# Allegro board 600-90681-01_CYW920721M2EPA2_Rev3.0.brd
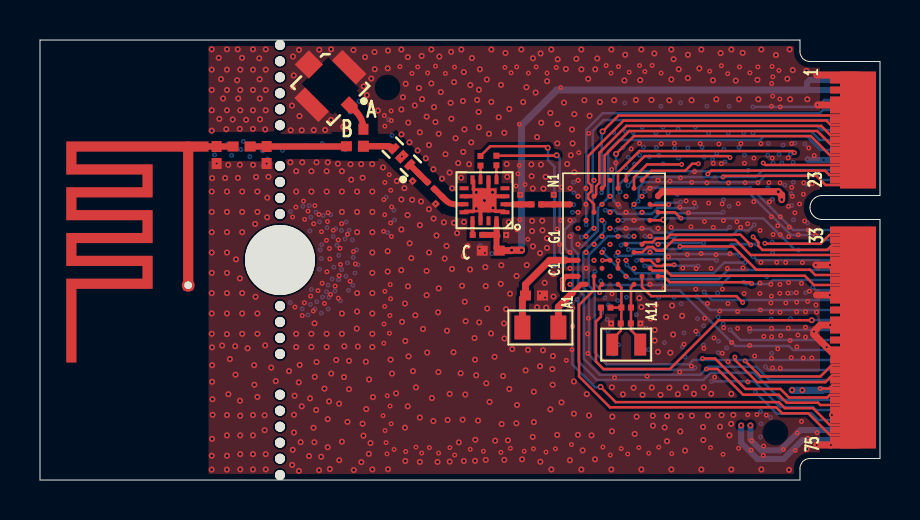
[diagram p0: board, top side]
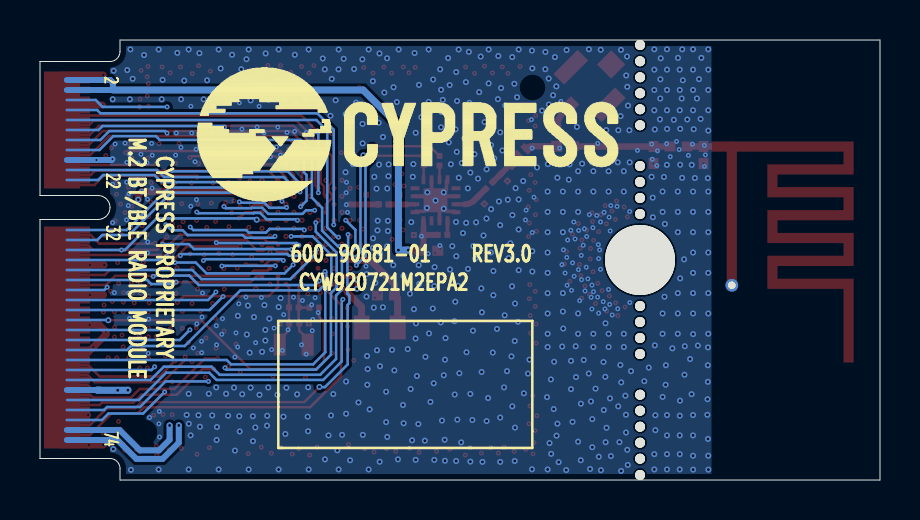
[diagram p1: board, bottom side, seen from below]

Outline 42 x 22 mm; copper layers: TOP, L02_GND, L03_PWR-GND, BOTTOM. Coordinates in mm from the lower left corner of the outline.
Outline path: 0,22 38,22 38,21.43 arc(38.15,21.07) 38.5,20.93 42,20.93 42,14.22 39.1,14.22 arc(38.68,14.05) 38.5,13.62 arc(38.68,13.2) 39.1,13.03 42,13.03 42,1.07 38.5,1.07 arc(38.15,0.93) 38,0.57 38,0 0,0 0,22

## Design rules (mm)
net group PWR: nets VBAT VDDIO VPA_BT

## Placement (name value [footprint] x y rotation side)
ANT1  MIFA PCB Antenna  [ANT_ETCH_MIFA-0000_01]  6.39 12.92 90 top
C1  4.7uF  [CAPC1005_IS0402Q]  24.7 9.23 0 top
C2  6pF  [CAPC0603_IS0201Q]  28.8 7.83 180 top
C3  6pF  [CAPC0603_IS0201Q]  29.78 7.83 0 top
C17  8.2pF  [CAPC1005_IS0402Q_OPT_AB_RA_M]  16.17 16.69 180 top
C18  100pF  [CAPC0603_IS0201Q]  23.07 12.25 180 top
C19  1uF  [CAPC1005_IS0402Q]  22.54 11.47 180 top
C20  9pF  [CAPC0603_IS0201Q]  21.87 12.26 180 top
FL1  LFB182G45CL3D178  [FILS3_MUR_LFB182G45Q]  18.09 16.17 135 top
J1  A-1JB  [AMPHL_A-1JB_ALT1]  14.52 19.7 45 top
J2  For MILI-67  [M_2_CARD_2230-XX-E_ANT]  40.9 20.25 90 top
L1  2.2uH  [BKPX_201210]  25.02 7.62 0 top
LC1  5.6pF  [CAPC1005_IS0402Q]  10.08 16.67 0 top
LC2  1pF  [CAPC1005_IS0402Q]  8.83 16.25 270 top
LC3  1pF  [CAPC1005_IS0402Q]  11.33 16.25 270 top
LC4  0 OHM  [RESC0603_IS0201Q]  19.54 14.72 315 top
LC5  100pF  [CAPC0603_IS0201Q]  19.95 13.97 45 top
LC6  100pF  [CAPC0603_IS0201Q]  18.8 15.12 45 top
LC7  0 OHM  [RESC0603_IS0201Q]  24.82 13.78 180 top
LC8  100pF  [CAPC0603_IS0201Q]  25.69 14.02 270 top
LC9  100pF  [CAPC0603_IS0201Q]  24.02 14.02 270 top
NOREF  -  []  -4.09 86.38 0 top
NOREF#2  -  []  363.24 -144.64 0 top
NOREF#3  -  []  38.3 20.97 0 top
NOREF#4  -  []  38.65 13.22 0 top
NOREF#5  -  []  0 0 90 top
NOREF#6  -  []  42 1.07 90 top
NOREF#7  -  []  83.84 43.32 0 top
NOREF#8  -  []  0 0 0 top
NOREF#9  -  []  0 22 0 top
NOREF#10  -  []  42 14.22 90 top
NOREF#11  -  []  129.37 -8.65 90 top
NOREF#12  -  []  -335.26 -223.38 0 top
NOREF#13  -  []  72.55 172.43 0 top
NOREF#14  -  []  -33 -33.2 0 top
NOREF#15  -  []  -60.47 -17.5 0 top
NOREF#16  -  []  363.24 -144.64 180 bottom
R1  0 OHM  [RESC0603_IS0201Q]  28.28 8.62 180 top
R6  10M OHM  [RESC0603_IS0201Q]  29.31 8.63 0 top
R7  0 OHM  [RESC0603_IS0201Q]  22.02 15.96 90 top
R8  0 OHM  [RESC0603_IS0201Q]  22.82 15.98 90 top
U1  LBCA1KU1WA-temp  [BGA42_590X510_LBCA1KU1PA-TEMP]  28.7 12.39 90 top
U3  8TR8211C  [QFN16_2X2_8TR8211]  22.22 13.99 180 top
Y1  32.768KHz  [9H03270044_2X1M2]  29.31 6.77 0 top

## Library data of the parts
ANT1 = ANT-FEED-GND: Tolerance: ?; User Part Number: *********
C1 = CAP: User Part Number: Part No; room: BASEBAND
C2 C3 LC5 LC6 LC8 LC9 = CAP: User Part Number: Part No
C17 = CAP-OPT-A-B_0: User Part Number: Part No; room: RF
C18-C20 LC1-LC3 = CAP: User Part Number: Part No; room: RF
FL1 = FILT-I1O3G2: User Part Number: Part No; room: RF
J1 = RF-3GND: User Part Number: Part No
J2 = M_2.2_Module_V1
L1 = IND: User Part Number: Part No; room: RF
LC4 LC7 R6-R8 = RES: User Part Number: Part No
R1 = RES: User Part Number: Part No; room: BASEBAND
U1 = TYPE-1PA: room: BASEBAND
U3 = 8TR8211C_QFN16
Y1 = XTAL: Tolerance: ?; User Part Number: *********

## Footprints (pads in the part's own frame, mm; a bottom-side part is the same pattern mirrored in y, then rotated)
9H03270044_2X1M2
  rect 0.6x1.1 smd: 1(-0.7,0) 2(0.7,0)
AMPHL_A-1JB_ALT1
  rect 0.75x1.7 smd: G1(-1.325,0) G3(1.325,0)
  rect 1x1 smd: G2(0,1.524)
  custom 0.6x0.75 smd: S(0,-1.399)
ANT_ETCH_MIFA-0000_01
  round 0.635 smd: FEED(3.683,-1.016)
  round 0.635 hole 0.381: GND(-3.188,-1.016)
BGA42_590X510_LBCA1KU1PA-TEMP
  round 0.25 smd: A1(-2.6,2.2) A3(-2.6,1.4) A5(-2.6,0.6) A7(-2.6,-0.2) A9(-2.6,-1) A11(-2.6,-1.8) B2(-2.2,1.8) B4(-2.2,1) B6(-2.2,0.2) B8(-2.2,-0.6) B10(-2.2,-1.4) B12(-2.2,-2.2) C1(-1.8,2.2) C3(-1.8,1.4) C5(-1.8,0.6) C7(-1.8,-0.2) C9(-1.8,-1) C11(-1.8,-1.8) D2(-1.4,1.8) D4(-1.4,1) D6(-1.4,0.2) D8(-1.4,-0.6) D10(-1.4,-1.4) D12(-1.4,-2.2) E1(-1,2.2) E3(-1,1.4) E5(-1,0.6) E7(-1,-0.2) E9(-1,-1) E11(-1,-1.8) F2(-0.6,1.8) F4(-0.6,1) F6(-0.6,0.2) F8(-0.6,-0.6) F10(-0.6,-1.4) F12(-0.6,-2.2) G1(-0.2,2.2) G3(-0.2,1.4) G5(-0.2,0.6) G7(-0.2,-0.2) G9(-0.2,-1) G11(-0.2,-1.8) H2(0.2,1.8) H4(0.2,1) H6(0.2,0.2) H8(0.2,-0.6) H10(0.2,-1.4) H12(0.2,-2.2) J1(0.6,2.2) J3(0.6,1.4) J5(0.6,0.6) J7(0.6,-0.2) J9(0.6,-1) J11(0.6,-1.8) K2(1,1.8) K4(1,1) K6(1,0.2) K8(1,-0.6) K10(1,-1.4) K12(1,-2.2) L1(1.4,2.2) L3(1.4,1.4) L5(1.4,0.6) L7(1.4,-0.2) L9(1.4,-1) L11(1.4,-1.8) M2(1.8,1.8) M4(1.8,1) M6(1.8,0.2) M8(1.8,-0.6) M10(1.8,-1.4) M12(1.8,-2.2) N1(2.2,2.2) N3(2.2,1.4) N5(2.2,0.6) N7(2.2,-0.2) N9(2.2,-1) N11(2.2,-1.8) P2(2.6,1.8) P4(2.6,1) P6(2.6,0.2) P8(2.6,-0.6) P10(2.6,-1.4) P12(2.6,-2.2)
BKPX_201210
  rect 0.8x1.2 smd: 1(-0.9,0) 2(0.9,0)
CAPC0603_IS0201Q
  rect 0.3x0.3 smd: 1(-0.24,0) 2(0.24,0)
CAPC1005_IS0402Q
  rect 0.55x0.5 smd: 1(-0.425,0) 2(0.425,0)
CAPC1005_IS0402Q_OPT_AB_RA_M
  rect 0.5x0.55 smd: A(0,-0.85)
  rect 0.55x0.5 smd: B(0.85,0)
  rect 0.55x0.55 smd: C(0,0)
FILS3_MUR_LFB182G45Q
  rect 0.3x0.55 smd: 1(-0.56,0) 3(0.56,0)
  rect 0.4x0.6 smd: 2(0,0)
M_2_CARD_2230-XX-E_ANT
  round 0.5 hole 0.5 unplated: (-20,28.902) (-19.186,28.902) (-18.386,28.902) (-17.586,28.902) (-16.786,28.902) (-15.986,28.902) (-13.95,28.9) (-13.15,28.9) (-12.35,28.9) (-11.55,28.9) (-6.95,28.9) (-6.15,28.9) (-5.35,28.9) (-4.55,28.9) (-2.514,28.902) (-1.714,28.902) (-0.914,28.902) (-0.114,28.902) (0.686,28.902) (1.5,28.902)
  round 3.5 hole 3.5 unplated: (-9.25,28.9)
  rect 0.35x1.8 smd: 1(0,0) 3(-0.5,0) 5(-1,0) 7(-1.5,0) 9(-2,0) 11(-2.5,0) 13(-3,0) 15(-3.5,0) 17(-4,0) 19(-4.5,0) 21(-5,0) 23(-5.5,0) 33(-8,0) 35(-8.5,0) 37(-9,0) 39(-9.5,0) 41(-10,0) 43(-10.5,0) 45(-11,0) 47(-11.5,0) 49(-12,0) 51(-12.5,0) 53(-13,0) 55(-13.5,0) 57(-14,0) 59(-14.5,0) 61(-15,0) 63(-15.5,0) 65(-16,0) 67(-16.5,0) 69(-17,0) 71(-17.5,0) 73(-18,0) 75(-18.5,0)
  rect 0.35x2.3 smd: 2(-0.25,0.25) 4(-0.75,0.25) 6(-1.25,0.25) 8(-1.75,0.25) 10(-2.25,0.25) 12(-2.75,0.25) 14(-3.25,0.25) 16(-3.75,0.25) 18(-4.25,0.25) 20(-4.75,0.25) 22(-5.25,0.25) 32(-7.75,0.25) 34(-8.25,0.25) 36(-8.75,0.25) 38(-9.25,0.25) 40(-9.75,0.25) 42(-10.25,0.25) 44(-10.75,0.25) 46(-11.25,0.25) 48(-11.75,0.25) 50(-12.25,0.25) 52(-12.75,0.25) 54(-13.25,0.25) 56(-13.75,0.25) 58(-14.25,0.25) 60(-14.75,0.25) 62(-15.25,0.25) 64(-15.75,0.25) 66(-16.25,0.25) 68(-16.75,0.25) 70(-17.25,0.25) 72(-17.75,0.25) 74(-18.25,0.25)
QFN16_2X2_8TR8211
  rect 0.45x0.2 smd: 1(-1.025,0.6) 2(-1.025,0.2) 3(-1.025,-0.2) 4(-1.025,-0.6) 9(1.025,-0.6) 10(1.025,-0.2) 11(1.025,0.2) 12(1.025,0.6)
  rect 0.2x0.45 smd: 5(-0.6,-1.025) 6(-0.2,-1.025) 7(0.2,-1.025) 8(0.6,-1.025) 13(0.6,1.025) 14(0.2,1.025) 15(-0.2,1.025) 16(-0.6,1.025)
  rect 1.2x1.2 smd: H(0,0)
RESC0603_IS0201Q
  rect 0.3x0.3 smd: 1(-0.24,0) 2(0.24,0)

## Nets
GND: ANT1.FEED ANT1.GND C1.2 C2.2 C3.2 C18.1 C19.2 FL1.2(GND) J1.G1(GND#G1) J1.G2(GND#G2) J1.G3(GND#G3) J2.1(GND_1) J2.7(GND_7) J2.18(GND_18) J2.39(GND_39) J2.45(GND_45) J2.51(GND_51) J2.57(GND_57) J2.69(GND_69) J2.75(GND_75) LC1.1 LC2.1 LC2.2 LC3.2 LC5.1 LC6.1 LC8.1 LC9.1 U1.A1(GND (A1)) U1.A11(GND (A11)) U1.C1(GND (C1)) U1.C3(GND (C3)) U1.E1(GND (E1)) U1.E11(GND (E11)) U1.F2(GND (F2)) U1.F12(GND (F12)) U1.G1(GND (G1)) U1.G11(GND (G11)) U1.H8(GND (H8)) U1.H10(GND (H10)) U1.H12(GND (H12)) U1.J1(GND (J1)) U1.J9(GND (J9)) U1.K2(GND (K2)) U1.K8(GND (K8)) U1.L3(GND (L3)) U1.L7(GND (L7)) U1.M2(GND (M2)) U1.N1(GND (N1)) U1.N3(GND (N3)) U1.N11(GND (N11)) U1.P2(GND (P2)) U1.P4(GND (P4)) U1.P12(GND (P12)) U3.1(GND1) U3.3(GND3) U3.6(GND6) U3.8(GND8) U3.10(GND10) U3.12(GND12) U3.14(GND14) U3.H(HS-GND)
VBAT: J2.72(VBAT_72) J2.74(VBAT_74) U1.B2(VDD3P3)
VDDIO: J2.64(VDDIO) U1.M12(VDDIO)
BT_GPIO_2: J2.48(COEX1) U1.L9(BT_GPIO_2)
BT_GPIO_3: J2.46(COEX2) U1.N9(BT_GPIO_3)
BT_GPIO_5: J2.44(COEX3) U1.N7(BT_GPIO_5)
BT_UART_CTS_N: J2.36(BT_UART_CTS) J2.63(RECOVERY) U1.J11(BT_UART_CTS_N)
BT_UART_RTS_N: J2.34(BT_UART_RTS) U1.L11(BT_UART_RTS_N)
BT_UART_RXD: J2.32(BT_UART_RXD) U1.M10(BT_UART_RXD)
BT_UART_TXD: J2.22(BT_UART_TXD) U1.K10(BT_UART_TXD)
CBUCK: C1.1 L1.1 U1.D2(BT_CBUCK_IN)
CRX: R7.2 U1.B8(P36)
CTX: R8.2 U1.D6(P35)
DEV_WAKE: J2.42(RSVD_11) U1.P8(BT_DEV_WAKE)
EXT_LPO: J2.50(EXT_LPO (32KHZ)) R1.2
HOST_WAKE: J2.20(RSVD_12) U1.M8(BT_HOST_WAKE)
P00: J2.14(IO7) U1.E5(P0)
P01: J2.23(IO2) U1.D8(P1)
P02: J2.38(IO3) U1.F10(P2)
P03: J2.37(IO5) U1.E9(P3)
P04: J2.13(IO12) U1.M4(P4)
P05: J2.35(IO4) U1.M6(P5)
P06: J2.15(IO11) U1.N5(P6)
P07: J2.9(IO13) U1.L5(P7)
P08: J2.17(A0) U1.J7(P8)
P09: J2.19(A1) U1.G9(P9)
P10: J2.21(IO10) U1.C9(P10)
P11: J2.58(SDA) U1.G7(P11)
P12: J2.60(SCL) U1.E7(P12)
P13: J2.40(IO9) U1.H4(P13)
P14: J2.43(RSVD_3) U1.C11(P14)
P15: J2.41(RSVD_4) U1.K12(P15)
P16: J2.67(A2) U1.H6(P16)
P17: J2.61(RSVD_1) U1.K6(P17)
P18: J2.59(RSVD_2) U1.G5(P18)
P21: J2.52(ARD_RST_N) U1.B10(P21)
P22: J2.70(RSVD_5) U1.B12(P22)
P23: J2.68(RSVD_6) U1.F6(P23)
P24: J2.66(RSVD_7) U1.B6(P24)
P25: J2.10(A5) U1.F4(P25)
P26: J2.6(LED1_N) U1.C7(P26)
P27: J2.16(LED2_N) U1.E3(P27)
P28: J2.65(A3) U1.D10(P28)
P29: J2.8(A4) U1.G3(P29)
P30: J2.56(RSVD_9) U1.D4(P30)
P31: J2.33(RSVD_10) U1.A5(P31)
P32: J2.73(IO0) U1.B4(P32)
P33: J2.71(IO1) U1.J3(P33)
P34: J2.12(IO6) U1.J5(P34)
P37: J2.62(RSVD_8) U1.H2(P37)
P38: J2.11(IO8) U1.K4(P38)
RF: LC7.1 LC8.2 U1.L1(BT_RF)
RST_N: J2.54(BT_RST_N) U1.P10(RST_N)
VPA_BT: C18.2 C19.1 C20.1 J2.2(VPA2 (1.8V/3.3V)) J2.4(VPA4 (1.8V/3.3V)) U3.16(VDD16)
N16860919: L1.2 U1.A3(BT_CBUCK_OUT)
N16861443: C3.1 R6.2 U1.A9(BT_XTAL_32K_O) Y1.2
N16861445: C2.1 R1.1 R6.1 U1.A7(BT_XTAL_32K_I) Y1.1
N18809916: LC7.2 LC9.2 U3.2(TXRX)
N18809920: FL1.1(IN) LC4.1 LC6.2
N18809926: LC4.2 LC5.2 U3.11(ANT)
N18809978: R7.1 U3.7(RXEN)
N18809980: R8.1 U3.5(TXEN)
N18810127: C20.2 U3.13(DNC13)
N18810374: C17.B LC1.2 LC3.1
N18810880: C17.C(COMMON) FL1.3(OUT)
N18837786: C17.A J1.S(IN)

Pads without a net: J2 3 5 47 49 53 55; U1 C5 D12 F8 P6; U3 4 9 15

## Via types
v1: diameter 0.25, hole 0.1, TOP to L02_GND, 412 vias
v2: diameter 0.3, hole 0.15, L02_GND to L03_PWR-GND, 364 vias
v3: diameter 0.25, hole 0.1, L03_PWR-GND to BOTTOM, 247 vias
v4: diameter 0.3, hole 0.15, TOP to BOTTOM, 580 vias

## Routing (per net, layer and track width the routed paths; a pad name or vN(x,y) marks a point on that pad's centre or on a via; arc(x,y) is an arc through that point)
GND: length 30.8
  TOP w0.18: U3.8 21.68,14.96 21.68,14.53 22.02,14.19 ; 22.37,13.84 U3.H 22.77,13.44 23.2,13.44 U3.1 ; 22.02,13.79 21.67,13.43 21.24,13.43 U3.12
  TOP w0.2: U3.H 22.02,14.19 U3.10
  TOP w0.203: U3.14 22.02,13.79 U3.H 22.42,14.19 ; 22.42,14.19 U3.6 ; 22.42,14.19 U3.3
  TOP w0.3: v1(39.6,3.25) J2.69
  TOP w0.318: LC1.1 LC2.1 7.48,16.67 ANT1.FEED
  TOP w0.35: J2.75 39.55,1.75 ; 39.55,1.75 v1(38.84,1.75) ; 39.55,1.75 v1(39.55,1.75) ; J2.1 v1(38.84,20.25) ; J2.39 v1(39.5,10.75) v1(38.79,10.75) ; J2.51 v1(39.51,7.75) 39.02,7.75 38.7,7.43 v1(38.7,7.42) 38.7,7.28 38.7,7.28 v1(39.33,6.64) 39.73,6.25 J2.57 ; J2.7 v1(38.88,18.75) ; J2.45 v1(39.49,9.25) 38.82,9.25
  L02_GND w0.125: v1(28.9,13.79) 28.89,13.79 28.53,13.79 28.24,13.51 27.76,13.51
  L02_GND w0.18: v1(29.3,13.39) 29.3,13.41 28.93,13.79 v1(28.9,13.79)
  BOTTOM w0.3: v3(38.38,16.04) 38.42,16 v3(39.18,16) J2.18
  vias: v1(8.83,15.82) v1(11.33,15.82) v1(12.63,13.15) v1(12.75,8.65) v1(12.79,13.65) v1(13.11,8.22) v1(13.18,13.95) v1(13.23,13.03) v1(13.22,8.86) v1(13.4,13.44) v1(13.54,9.2) v1(13.74,13.72) v1(13.68,12.81) v1(13.66,8.45) v1(13.95,13.28) v1(13.9,9.47) v1(14.07,12.41) v1(14.11,9.84) v1(14.22,8.83) v1(14.32,11.98) v1(14.35,10.41) v1(14.4,13.37) v1(14.37,12.92) v1(14.47,11.58) v1(14.49,11.05) v1(14.53,9.28) v1(14.66,12.49) v1(14.75,9.7) v1(14.91,12) v1(14.91,9.09) v1(15,11.59) v1(15.02,10.78) v1(14.96,10.22) v1(15.08,12.81) v1(15.38,12.28) v1(15.51,9.94) v1(15.68,11.42) v1(15.77,10.8) v1(17.21,18.23) v1(17.24,17.69) v1(17.24,14.88) v1(17.19,14.02) v1(17.23,13.26) v1(17.18,12.44) v1(17.24,9.44) v1(17.23,8.68) v1(17.2,7.79) v1(17.19,6.84) v1(17.16,3.22) v1(17.25,2.47) v1(17.3,1.87) v1(17.35,1.31) v1(17.36,4.21) v1(17.46,15.27) v1(17.54,14.48) v1(17.53,12.85) v1(17.51,9.77) v1(17.53,9.06) v1(17.5,8.22) v1(17.47,7.34) v1(17.5,3.7) v1(17.55,18.45) v1(17.56,17.97) v1(17.59,13.65) v1(17.57,12.18) v1(17.55,2.81) v1(17.7,1.53) v1(18,20.67) v1(18.09,16.18) v1(18.29,1.43) v1(18.6,20.33) v1(18.64,14.94) v1(18.8,1.65) v1(18.89,20.66) v1(19.09,1.35) v1(19.38,20.35) v1(19.47,1.62) v1(19.77,20.69) v1(19.78,13.81) v1(19.93,1.35) v1(20.27,20.33) v1(20.49,1.62) v1(20.73,20.65) v1(20.73,1.25) v1(21.51,1.54) v1(21.98,11.57) v1(22.24,11.35) v1(22.17,1.44) v1(23.05,1.38) v1(23.25,20.63) v1(23.31,12.25) v1(23.52,1.59) v1(23.55,20.36) v1(23.84,20.66) v1(23.8,14.7) v1(23.85,12.51) v1(23.9,15.31) v1(23.97,17.79) v1(23.96,15.73) v1(24.02,14.26) v1(23.99,13.02) v1(24.21,1.44) v1(24.25,14.78) v1(24.42,20.34) v1(24.39,12.04) v1(24.67,1.56) v1(24.8,20.66) v1(24.99,9.34) v1(25.26,9.11) v1(25.3,1.39) v1(25.35,20.34) v1(25.69,14.26) v1(25.81,20.62) v1(25.77,1.56) v1(25.86,12.54) v1(26.04,19.62) v1(26.03,12.99) v1(25.98,11.78) v1(26.07,14.64) v1(26.32,5.98) v1(26.5,14.59) v1(26.5,12.99) v1(26.5,12.19) v1(26.5,11.39) v1(26.5,10.59) v1(26.5,9.79) v1(26.63,8.6) v1(26.63,7.68) v1(26.6,6.51) v1(26.57,1.77) v1(26.94,16.37) v1(26.9,14.99) v1(26.9,14.19) v1(26.9,13.39) v1(26.9,11.79) v1(27.3,14.59) v1(27.3,13.79) v1(27.3,10.59) v1(27.43,17.33) v1(27.42,8.09) v1(27.38,7.3) v1(27.4,6.33) v1(27.7,14.99) v1(28.14,1.65) v1(28.3,20.72) v1(28.51,1.25) v1(28.55,20.34) v1(28.58,15.53) v1(28.6,9.31) v1(28.56,7.83) v1(28.73,5.12) v1(28.79,15.85) v1(28.93,20.67) v1(29.06,1.57) v1(29.3,12.59) v1(29.38,1.3) v1(29.46,20.39) v1(29.56,16.55) v1(29.7,12.99) v1(29.94,1.62) v1(29.98,20.72) v1(29.98,16.84) v1(30.02,7.83) v1(30.1,12.59) v1(30.24,20.43) v1(30.35,5.19) v1(30.44,1.34) v1(30.5,14.59) v1(30.5,12.19) v1(30.5,11.39) v1(30.5,9.79) v1(30.61,20.73) v1(30.9,14.99) v1(30.9,12.59) v1(30.9,11.79) v1(30.94,1.64) v1(31.06,20.34) v1(31.06,16.81) v1(31.2,9.58) v1(31.42,11.16) v1(31.5,14.95) v1(31.56,12.63) v1(31.59,1.31) v1(31.72,16.84) v1(32.02,15.11) v1(32,13.64) v1(31.98,5.4) v1(32.14,10.6) v1(32.2,6.79) v1(32.3,13.96) v1(32.42,13.36) v1(32.37,11.27) v1(32.55,12.66) v1(32.58,14.88) v1(32.57,5.7) v1(32.73,15.42) v1(32.72,13.86) v1(32.81,10.57) v1(32.79,9.54) v1(32.8,7.44) v1(33.01,16.82) v1(33.05,11.32) v1(33.22,12.93) v1(33.23,8.09) v1(33.2,6.58) v1(33.34,14.86) v1(33.44,13.85) v1(33.37,8.82) v1(33.48,20.44) v1(33.53,1.62) v1(33.55,10.58) v1(33.66,15.83) v1(33.66,12.63) v1(33.7,7.1) v1(33.73,5.14) v1(33.8,11.27) v1(33.95,16.8) v1(33.98,8.45) v1(34.07,20.71) v1(34.06,15.82) v1(34.11,13.8) v1(34.12,9.54) v1(34.11,6.34) v1(34.17,12.97) v1(34.19,7.61) v1(34.15,1.29) v1(34.39,20.31) v1(34.42,14.85) v1(34.37,10.57) v1(34.4,8.82) v1(34.4,5.92) v1(34.5,11.31) v1(34.58,6.88) v1(34.84,12.91) v1(34.91,13.81) v1(34.88,8.43) v1(34.88,7.58) v1(34.93,1.59) v1(34.98,20.66) v1(35.05,16.82) v1(35.03,12.63) v1(35.15,10.61) v1(35.22,15.84) v1(35.2,9.32) v1(35.26,14.87) v1(35.38,12.81) v1(35.39,4.91) v1(35.39,3.26) v1(35.49,20.36) v1(35.48,7.58) v1(35.49,6.73) v1(35.59,1.96) v1(35.55,1.5) v1(35.7,16.09) v1(35.69,13.92) v1(35.73,6.2) v1(35.85,3.27) v1(35.89,20.66) v1(35.9,14.87) v1(36.05,16.82) v1(36,12.48) v1(36.04,10.88) v1(36,9.84) v1(35.99,9.33) v1(36.02,8.5) v1(36.19,7.18) v1(36.18,1.7) v1(36.16,1.23) v1(36.31,3.24) v1(36.45,14.87) v1(36.47,13.91) v1(36.54,9.78) v1(36.55,8.86) v1(36.61,20.68) v1(36.64,20.16) v1(36.58,19.82) v1(36.64,19.2) v1(36.58,18.69) v1(36.61,16.1) v1(36.57,13.16) v1(36.57,9.2) v1(36.57,8.4) v1(36.58,7.58) v1(36.58,7.16) v1(36.58,6.08) v1(36.63,5.6) v1(36.65,12.28) v1(36.83,10.88) v1(36.95,20.48) v1(36.89,12.71) v1(36.89,6.56) v1(36.99,19.05) v1(37.01,18.66) v1(37,14.86) v1(37.01,13.16) v1(37.01,12.26) v1(37,9.78) v1(36.99,9.34) v1(37,8.39) v1(37.03,7.22) v1(37.02,5.59) v1(37.17,1.53) v1(37.28,10.88) v1(37.29,8.86) v1(37.41,16.11) v1(37.42,13.69) v1(37.43,12.17) v1(37.43,9.87) v1(37.39,9.34) v1(37.42,7.59) v1(37.47,12.65) v1(37.51,6.97) v1(37.59,16.82) v1(37.59,14.63) v1(37.62,14.19) v1(37.56,6.12) v1(37.74,13.37) v1(37.81,9.37) v1(37.84,8.89) v1(37.83,8.4) v1(37.84,6.66) v1(37.76,1.48) v1(37.91,12.26) v1(37.9,7.25) v1(37.86,2.36) v1(37.98,13.8) v1(38.12,10.87) v1(38.07,9.83) v1(38.08,2.93) v1(38.19,14.86) v1(38.17,14.29) v1(38.23,12.95) v1(38.16,6.1) v1(38.27,8.41) v1(38.27,7.63) v1(38.27,7.15) v1(38.44,16.6) v1(38.41,12.5) v1(38.39,8.93) v1(38.39,2.09) v1(38.47,9.44) v1(38.61,14.82) v1(38.59,6.11) v1(38.71,16.22) v1(38.77,12.23) v1(38.8,8.75) v1(38.83,8.39) v1(38.85,2.37) v2(12.12,16.95) v2(12.46,13.73) v2(12.63,8.2) v2(12.71,16.42) v2(12.9,16.95) v2(12.91,12.92) v2(12.87,9.06) v2(13.05,20.63) v2(13.05,13.37) v2(13.21,9.25) v2(13.44,20.98) v2(13.4,19.05) v2(13.45,16.43) v2(13.39,12.76) v2(13.63,16.97) v2(13.79,12.48) v2(13.77,9.77) v2(13.98,18.44) v2(14.03,12.09) v2(14.12,13.62) v2(14.07,10.2) v2(14.1,8.44) v2(14.23,10.79) v2(14.33,16.43) v2(14.29,11.3) v2(14.63,8.86) v2(14.66,17.16) v2(14.79,13) v2(14.88,21.12) v2(15.12,9.35) v2(15.19,9.78) v2(15.34,11.73) v2(15.29,11.21) v2(15.44,10.52) v2(15.56,17.32) v2(15.68,20.64) v2(16.22,18.39) v2(16.77,16.52) v2(16.86,17.39) v2(17.61,15.88) v2(18.2,16.49) v2(18.66,15.09) v2(18.91,15.67) v2(19.46,15.01) v2(19.45,14.49) v2(19.75,13.89) v2(20.11,14.46) v2(21,13.99) v2(21.75,12.48) v2(22.16,16.56) v2(22.24,15.22) v2(22.54,12.75) v2(22.89,16.58) v2(23.36,14.39) v2(23.56,13.66) v2(23.82,17.17) v2(23.88,16.56) v2(23.91,7.37) v2(24,7.85) v2(24.08,8.78) v2(24.15,13.56) v2(24.2,9.65) v2(24.35,17.27) v2(24.63,16.37) v2(24.66,18.48) v2(24.68,10.27) v2(24.76,13.86) v2(24.87,7.36) v2(25.2,7.96) v2(25.43,19.03) v2(25.43,10.79) v2(25.49,17.39) v2(25.57,13.79) v2(25.64,7.47) v2(25.62,6.86) v2(25.68,8.31) v2(25.92,15.33) v2(26.27,13.46) v2(26.38,14.03) v2(26.59,19.92) v2(26.64,10.23) v2(26.84,9.45) v2(26.82,7.15) v2(26.79,5.97) v2(27.01,19.44) v2(27.03,8.6) v2(27.13,16.79) v2(27.06,7.73) v2(27.25,10.11) v2(27.42,5.56) v2(27.6,8.66) v2(27.68,19.44) v2(27.91,17.8) v2(27.92,15.94) v2(27.95,15.43) v2(28.11,7.18) v2(28.07,5.72) v2(28.31,19.71) v2(28.26,5.18) v2(28.45,14.76) v2(28.45,6.64) v2(28.48,18.2) v2(28.48,15.26) v2(28.54,8.46) v2(28.72,1.66) v2(29.01,17.67) v2(29,15.63) v2(28.97,7.33) v2(29.07,9.57) v2(29.08,6.08) v2(29.23,19.49) v2(29.25,18.55) v2(29.3,17.12) v2(29.29,8) v2(29.42,8.87) v2(29.37,6.54) v2(29.68,18.28) v2(29.75,17.09) v2(29.7,16.23) v2(29.81,17.68) v2(29.79,5.62) v2(29.93,15.46) v2(29.86,14.7) v2(29.91,9.79) v2(29.87,1.23) v2(30.11,11.59) v2(30.23,11.17) v2(30.18,7.14) v2(30.34,1.71) v2(30.41,18.02) v2(30.39,15.18) v2(30.52,17.4) v2(30.49,16.67) v2(30.49,15.88) v2(30.51,13.53) v2(30.63,9.19) v2(30.61,5.87) v2(30.71,19.43) v2(30.73,10.98) v2(30.91,14.2) v2(31.13,14.71) v2(31.15,9.5) v2(31.22,16.36) v2(31.24,5.51) v2(31.35,17.02) v2(31.33,12.02) v2(31.29,10.76) v2(31.37,18.38) v2(31.36,17.87) v2(31.36,11.44) v2(31.45,9.8) v2(31.46,15.86) v2(31.6,13.03) v2(31.62,12.31) v2(31.73,11.22) v2(31.86,19.44) v2(31.88,9.79) v2(31.91,9.37) v2(31.88,5.87) v2(32.01,16.7) v2(31.99,14.81) v2(32.05,18.57) v2(32.05,17.8) v2(32.19,17.39) v2(32.3,16.29) v2(32.36,5.41) v2(32.68,2.07) v2(32.77,1.13) v2(33.03,8.57) v2(33.07,19.56) v2(33.14,18.45) v2(33.13,17.34) v2(33.12,5.07) v2(33.59,16.5) v2(33.63,1.27) v2(33.66,20.73) v2(33.72,18.04) v2(33.87,9.95) v2(34.03,16.13) v2(33.99,7.21) v2(33.97,6.65) v2(34.01,4.78) v2(34.09,17.39) v2(34.05,5.29) v2(34.06,1.78) v2(34.21,19.46) v2(34.25,15.58) v2(34.35,18.98) v2(34.26,18.45) v2(34.26,14.46) v2(34.45,17.78) v2(34.49,5.45) v2(34.56,20.7) v2(34.62,16.55) v2(34.72,4.85) v2(34.67,1.19) v2(35.08,17.73) v2(35.23,18.55) v2(35.35,4.09) v2(35.44,20.76) v2(35.44,5.21) v2(35.41,1.1) v2(35.57,19.46) v2(35.85,3.96) v2(36.5,3.71) v2(36.61,13.47) v2(36.56,12.58) v2(36.56,9.5) v2(36.58,6.68) v2(36.61,5.28) v2(36.77,18.43) v2(36.77,4.09) v2(36.82,1.04) v2(36.89,19.62) v2(36.86,16.64) v2(36.95,15.52) v2(37.03,17.02) v2(37.13,17.87) v2(37.15,3.25) v2(37.42,1) v2(37.55,1.97) v2(37.56,15.61) v2(37.61,11.92) v2(37.57,10.88) v2(37.57,9.62) v2(37.57,9.06) v2(37.57,7.3) v2(37.56,6.52) v2(37.58,5.78) v2(37.69,18.41) v2(37.66,17.23) v2(37.69,3.68) v2(37.65,2.82) v2(37.94,17.8) v2(38.08,19.76) v2(38.07,12.02) v2(38.12,3.36) v2(38.33,17.31) v2(38.27,10.08) v2(38.28,2.51) v2(38.4,14.51) v2(38.41,6.59) v2(38.47,15.09) v2(38.64,18.08) v2(38.61,15.77) v2(38.64,9.18) v2(38.55,5.73) v2(38.66,3.76) v2(38.76,7) v2(38.87,19.62) v2(38.89,14.75) v2(38.95,6.09) v2(38.86,2.89) v2(39.02,17.46) v2(39.02,16.52) v2(39.02,11.64) v2(39,9.9) v2(39.07,18.37) v2(39.08,12.51) v2(39.06,1.98) v2(39.19,10.38) v2(39.17,9.47) v2(39.16,7.81) v2(39.19,3.59) v2(39.24,3.05) v2(39.29,17.98) v2(39.29,11.22) v2(39.27,7.11) v2(39.44,15.3) v2(39.4,11.85) v2(39.35,8.31) v2(39.36,5.48) v2(39.38,4.94) v2(39.38,4.15) v2(39.41,2.58) v2(39.54,19.94) v2(39.48,16.91) v2(39.55,12.38) v2(39.48,9.99) v2(39.58,19.05) v2(39.62,8.8) v2(39.7,11.37) v2(39.71,6.49) v2(39.72,2.22) v2(39.8,20.41) v2(39.77,5.97) v2(39.83,4.74) v2(39.86,18.08) v2(39.9,15.99) v2(39.99,17.15) v2(39.97,14.72) v2(40.14,10.05) v2(40.15,7.32) v2(40.23,3.78) v2(40.33,18.81) v2(40.3,17.69) v2(40.3,11.64) v2(40.34,6.13) v2(40.26,5.39) v2(40.27,4.35) v2(40.3,2.66) v2(40.37,20.4) v2(40.39,19.62) v2(40.36,18.35) v2(40.37,16.34) v2(40.43,12.46) v2(40.4,9.39) v2(40.37,8.62) v2(40.44,7.88) v2(40.35,3.34) v2(40.54,15.52) v2(40.47,10.67) v2(40.48,1.82) v3(8.73,16.25) v3(8.79,16.73) v3(8.78,15.68) v3(9.38,16.79) v3(9.58,16.23) v3(10.04,16.52) v3(10.17,16.93) v3(10.49,16.16) v3(10.67,16.81) v3(11.13,16.46) v3(11.15,15.71) v3(11.41,16.8) v3(11.38,16.04) v3(12.12,16.48) v3(12.52,13.42) v3(12.51,8.87) v3(13.15,13.68) v3(13.11,8.56) v3(13.28,16.73) v3(13.39,8.25) v3(13.46,13.72) v3(13.54,13.14) v3(13.49,12.45) v3(13.52,8.78) v3(13.57,9.53) v3(13.79,13.38) v3(13.84,8.91) v3(13.75,8.55) v3(13.97,12.9) v3(14.02,11.5) v3(13.97,10.54) v3(14.11,16.83) v3(14.09,11.77) v3(14.07,11.07) v3(14.12,9.14) v3(14.07,8.34) v3(14.16,13.23) v3(14.32,9.41) v3(14.35,12.62) v3(14.4,9.75) v3(14.44,9.14) v3(14.41,8.55) v3(14.53,13.27) v3(14.61,10.06) v3(14.66,12.18) v3(14.69,10.64) v3(14.75,9.45) v3(14.78,12.56) v3(14.84,11.74) v3(14.94,11.23) v3(14.93,10.01) v3(15.02,8.96) v3(15.07,12.48) v3(15.08,10.52) v3(15.25,12.05) v3(15.27,16.51) v3(15.31,12.9) v3(15.29,10.19) v3(15.37,10.86) v3(15.42,9.48) v3(15.51,18.39) v3(15.46,12.48) v3(15.62,12) v3(15.64,9.73) v3(15.66,11.13) v3(15.75,10.35) v3(15.83,11.51) v3(15.9,10.77) v3(15.95,18.93) v3(16.02,16.59) v3(16.24,17.52) v3(17.3,14.14) v3(17.43,18.02) v3(17.39,16.59) v3(17.38,12.37) v3(17.61,17.23) v3(17.7,13.49) v3(17.73,13) v3(22.01,11.72) v3(22.59,11.32) v3(22.93,12.19) v3(25.7,10.69) v3(26.62,13.38) v3(26.68,14.88) v3(26.69,14.37) v3(26.68,13.77) v3(28.09,8.37) v3(28.24,9.12) v3(28.42,8.76) v3(28.36,8.03) v3(28.39,7.46) v3(28.68,17.38) v3(28.69,6.29) v3(28.88,8.97) v3(28.93,6.76) v3(29.24,18.85) v3(29.15,16.61) v3(29.27,17.43) v3(29.29,15.62) v3(29.32,9.14) v3(29.41,16.13) v3(29.65,17.38) v3(29.6,7.52) v3(29.73,15.79) v3(29.82,8.27) v3(29.88,6.48) v3(29.98,16.24) v3(30.11,17.64) v3(30.18,16.65) v3(30.3,7.6) v3(30.42,6.52) v3(30.48,16.16) v3(30.8,17.36) v3(30.81,16.63) v3(30.94,16.23) v3(30.93,9.13) v3(31.05,18.68) v3(31.15,17.65) v3(31.16,15.81) v3(31.22,6.87) v3(31.41,17.34) v3(31.73,16.59) v3(31.7,9.14) v3(31.91,17.54) v3(31.93,16.1) v3(32.03,18.86) v3(32.06,8.81) v3(32.12,6.65) v3(32.2,7.36) v3(32.26,6.15) v3(32.39,16.6) v3(32.88,8.06) v3(32.91,7.29) v3(33.11,16.63) v3(33.21,16.15) v3(33.18,7.71) v3(33.17,6.76) v3(33.34,18.69) v3(33.43,17.34) v3(33.63,16.02) v3(33.84,16.34) v3(33.88,9.35) v3(33.9,8.15) v3(33.92,6.93) v3(33.91,6.37) v3(34.19,16.54) v3(34.17,14.02) v3(34.16,7.81) v3(34.25,15.91) v3(34.33,6.61) v3(34.41,17.35) v3(34.46,18.68) v3(34.46,13.69) v3(34.95,16.63) v3(35.19,17.35) v3(35.22,16.25) v3(36.03,3.43) v3(36.02,2.15) v3(36.05,2.81) v3(36.42,16.83) v3(36.39,16.24) v3(36.39,14.6) v3(36.52,3.12) v3(36.62,14.04) v3(36.61,11.9) v3(36.63,11.36) v3(36.56,8.04) v3(36.59,6.33) v3(36.65,15.86) v3(36.95,16.29) v3(37.09,15.85) v3(37.16,16.74) v3(37.24,14.75) v3(37.52,16.29) v3(37.52,8.07) v3(37.55,14.32) v3(37.59,13.72) v3(37.57,9.34) v3(37.75,16.84) v3(37.66,15.88) v3(37.67,14.89) v3(37.67,13.01) v3(38.25,16.8) v3(38.28,9.37) v3(38.37,14.79) v3(38.37,12.87) v4(8.59,21.53) v4(8.59,20.52) v4(8.59,19.5) v4(8.59,18.49) v4(8.59,17.47) v4(8.61,15.09) v4(8.59,14.42) v4(8.59,13.41) v4(8.59,12.39) v4(8.59,11.37) v4(8.59,10.36) v4(8.59,9.34) v4(8.59,8.33) v4(8.59,7.31) v4(8.6,6.63) v4(8.61,5.74) v4(8.61,4.91) v4(8.62,4.04) v4(8.63,3.26) v4(8.6,2.05) v4(8.59,1.21) v4(8.58,0.52) v4(8.93,21.11) v4(8.97,18.05) v4(9.05,20.04) v4(9.11,6.72) v4(9.15,19.07) v4(9.35,21.53) v4(9.35,20.52) v4(9.35,19.5) v4(9.35,18.49) v4(9.31,17.54) v4(9.26,15.1) v4(9.35,14.42) v4(9.35,13.41) v4(9.35,12.39) v4(9.35,11.37) v4(9.35,10.36) v4(9.35,9.34) v4(9.35,8.33) v4(9.34,7.29) v4(9.35,3.25) v4(9.35,2.23) v4(9.35,1.21) v4(9.34,0.52) v4(9.41,15.76) v4(9.42,4.29) v4(9.49,6.05) v4(9.63,18.02) v4(9.8,11.03) v4(9.76,6.69) v4(9.78,5.26) v4(9.89,21.53) v4(9.86,19.98) v4(9.91,19.07) v4(9.89,15.11) v4(10.01,20.52) v4(10.01,19.5) v4(10.01,18.49) v4(9.99,17.56) v4(9.99,15.77) v4(9.99,10.08) v4(10,3.97) v4(10.01,3.22) v4(10.01,2.23) v4(10.01,1.29) v4(10.01,0.53) v4(10.1,21.11) v4(10.11,14.42) v4(10.11,13.41) v4(10.11,12.39) v4(10.11,9.34) v4(10.11,8.33) v4(10.11,7.31) v4(10.31,18.01) v4(10.38,6.58) v4(10.65,21.53) v4(10.65,20.52) v4(10.65,19.5) v4(10.65,18.49) v4(10.64,17.55) v4(10.65,3.25) v4(10.65,2.23) v4(10.65,1.29) v4(10.65,0.53) v4(10.65,15.76) v4(10.71,5.74) v4(10.72,4.76) v4(10.8,15.15) v4(10.76,12.8) v4(10.78,9.16) v4(10.87,14.42) v4(10.87,13.41) v4(10.87,8.33) v4(10.87,7.31) v4(10.87,4.16) v4(10.96,21.09) v4(10.98,20.04) v4(10.99,19.07) v4(11,18.03) v4(11.23,3.24) v4(11.23,2.49) v4(11.28,21.53) v4(11.28,20.52) v4(11.28,19.5) v4(11.28,18.49) v4(11.26,17.53) v4(11.26,6.73) v4(11.28,1.29) v4(11.28,0.53) v4(11.42,15.16) v4(11.37,14.12) v4(11.36,13.13) v4(11.56,5.62) v4(11.79,4.94) v4(12.53,17.49) v4(12.52,15.88) v4(12.45,5.44) v4(12.63,19.66) v4(12.6,18.72) v4(12.64,1.51) v4(12.61,0.75) v4(12.65,21.18) v4(12.69,20.23) v4(12.73,4.21) v4(12.7,3.26) v4(12.7,2.37) v4(12.81,15.44) v4(12.81,14.42) v4(12.81,7.31) v4(12.81,6.65) v4(12.94,4.88) v4(12.94,0.45) v4(12.95,21.51) v4(12.97,18.2) v4(12.98,5.75) v4(13.03,1.89) v4(13.09,17.49) v4(13.12,15.88) v4(13.09,3.68) v4(13.5,4.08) v4(13.46,1.2) v4(13.57,15.44) v4(13.57,14.42) v4(13.57,7.31) v4(13.57,6.65) v4(13.68,17.5) v4(13.73,7.84) v4(13.73,5.16) v4(13.68,2.61) v4(13.72,1.89) v4(13.82,15.88) v4(13.82,5.9) v4(13.81,3.5) v4(13.96,21.51) v4(13.95,0.49) v4(14.06,1.16) v4(14.22,4.57) v4(14.26,17.5) v4(14.33,15.44) v4(14.33,14.42) v4(14.33,7.31) v4(14.33,6.65) v4(14.39,15.88) v4(14.38,3.04) v4(14.38,1.64) v4(14.55,18.01) v4(14.45,3.93) v4(14.49,0.55) v4(14.55,21.54) v4(14.56,5.32) v4(14.82,6) v4(14.89,15.82) v4(14.96,3.82) v4(14.96,0.99) v4(15.09,15.44) v4(15.09,14.42) v4(15.09,13.41) v4(15.09,8.33) v4(15.09,7.31) v4(15.09,1.92) v4(15.16,17.66) v4(15.22,6.69) v4(15.2,5.14) v4(15.38,2.91) v4(15.53,15.79) v4(15.45,5.96) v4(15.45,4.54) v4(15.56,15.02) v4(15.67,21.5) v4(15.69,0.5) v4(15.84,7.57) v4(15.86,14.42) v4(15.86,13.41) v4(15.86,12.39) v4(15.86,9.34) v4(15.85,8.42) v4(15.89,6.67) v4(16.06,15.79) v4(16.13,15.12) v4(16.13,2.82) v4(16.07,0.89) v4(16.18,19.68) v4(16.17,2.22) v4(16.25,21.14) v4(16.34,19.24) v4(16.29,5.92) v4(16.32,3.55) v4(16.44,1.31) v4(16.45,5.03) v4(16.52,1.85) v4(16.57,20.07) v4(16.56,18.77) v4(16.61,15.79) v4(16.62,14.42) v4(16.62,13.41) v4(16.62,12.39) v4(16.62,11.37) v4(16.62,10.36) v4(16.62,9.34) v4(16.62,8.33) v4(16.62,7.31) v4(16.62,6.65) v4(16.65,4.14) v4(16.62,0.53) v4(16.73,21.4) v4(16.73,20.54) v4(16.9,18.47) v4(17.15,15.63) v4(17.4,21.47) v4(17.38,20.58) v4(17.38,11.44) v4(17.38,10.42) v4(17.4,0.53) v4(17.53,6.02) v4(17.6,5.32) v4(17.84,14.95) v4(17.81,4.33) v4(18.07,21.53) v4(18.14,19.14) v4(18.07,18.53) v4(18.07,17.28) v4(18.07,14.03) v4(18.07,12.53) v4(18.07,10.49) v4(18.1,7.91) v4(18.22,14.59) v4(18.28,19.81) v4(18.25,8.82) v4(18.27,6.95) v4(18.25,2.62) v4(18.27,0.95) v4(18.39,21.14) v4(18.41,17.87) v4(18.38,13.25) v4(18.4,9.68) v4(18.43,6.18) v4(18.39,3.68) v4(18.47,16.88) v4(18.48,11.83) v4(18.61,14.02) v4(18.57,11.1) v4(18.74,18.73) v4(18.65,5.44) v4(18.77,8.23) v4(18.8,4.63) v4(18.95,19.6) v4(18.88,16.48) v4(18.99,17.38) v4(18.99,12.74) v4(18.99,3.12) v4(18.99,0.9) v4(19.08,21.2) v4(19.11,19.04) v4(19.05,13.93) v4(19.15,7.55) v4(19.33,18.17) v4(19.29,16.08) v4(19.33,10.45) v4(19.33,9.24) v4(19.45,16.75) v4(19.45,13.54) v4(19.36,6.37) v4(19.45,11.38) v4(19.57,21.53) v4(19.57,19.83) v4(19.59,4.1) v4(19.7,18.64) v4(19.67,15.54) v4(19.68,13.07) v4(19.67,2.95) v4(19.77,17.9) v4(19.82,12.22) v4(19.93,17.31) v4(19.93,9.58) v4(19.91,8.38) v4(19.92,5.4) v4(19.88,0.9) v4(19.97,21.17) v4(20.04,19.39) v4(20.1,15.07) v4(20.2,12.88) v4(20.23,11.07) v4(20.27,16.29) v4(20.33,11.7) v4(20.35,7.47) v4(20.38,3) v4(20.53,18.86) v4(20.48,15.37) v4(20.48,4.3) v4(20.48,0.92) v4(20.56,21.41) v4(20.57,18.06) v4(20.61,14.58) v4(20.6,10.55) v4(20.7,19.89) v4(20.69,12.86) v4(20.68,6.39) v4(20.78,17.09) v4(20.91,15.84) v4(20.85,12.34) v4(20.94,1.88) v4(21.03,5.34) v4(21.07,21.53) v4(21.15,18.95) v4(21.06,15.12) v4(21.1,9.71) v4(21.13,3.02) v4(21.19,20.39) v4(21.22,17.53) v4(21.16,16.41) v4(21.2,12.9) v4(21.18,11.19) v4(21.23,8.91) v4(21.19,0.95) v4(21.28,7.94) v4(21.27,4.28) v4(21.39,11.69) v4(21.52,19.75) v4(21.46,15.79) v4(21.5,10.53) v4(21.59,21.1) v4(21.56,16.88) v4(21.73,7.1) v4(21.81,14.38) v4(21.81,13.57) v4(21.75,6.02) v4(21.81,5.24) v4(21.77,2.01) v4(21.75,0.96) v4(21.95,19.51) v4(21.86,19.01) v4(21.93,18.4) v4(21.95,17.63) v4(21.9,2.97) v4(21.99,20.53) v4(21.96,7.88) v4(22.22,13.97) v4(22.34,20.02) v4(22.27,10.64) v4(22.29,9.7) v4(22.32,4.83) v4(22.29,1.01) v4(22.45,17.31) v4(22.36,8.57) v4(22.55,7.33) v4(22.48,3.91) v4(22.57,21.53) v4(22.57,18.91) v4(22.63,14.38) v4(22.66,13.6) v4(22.73,6.16) v4(22.76,1.97) v4(22.93,18.14) v4(23.04,9.81) v4(23.05,19.76) v4(23.07,10.74) v4(23.08,2.8) v4(23.21,17.36) v4(23.2,7.83) v4(23.22,7.08) v4(23.16,5.2) v4(23.22,1.01) v4(23.27,21.35) v4(23.33,15.79) v4(23.3,8.54) v4(23.36,15.16) v4(23.44,12.89) v4(23.39,1.98) v4(23.47,18.55) v4(23.5,9.31) v4(23.47,4.55) v4(23.62,6.54) v4(23.83,10.2) v4(23.85,3.75) v4(23.82,2.84) v4(24.07,21.53) v4(24.1,1.03) v4(24.16,18.9) v4(24.32,19.64) v4(24.34,10.75) v4(24.28,5.48) v4(24.4,6.51) v4(24.65,21.09) v4(24.57,15.78) v4(24.58,15.19) v4(24.63,14.57) v4(24.61,12.96) v4(24.61,12.45) v4(24.65,11.68) v4(24.63,2.15) v4(24.69,4.42) v4(24.69,2.89) v4(24.78,19.37) v4(24.86,17.15) v4(24.86,8.63) v4(25.03,21.33) v4(25.05,15.77) v4(25,11.34) v4(25,5.69) v4(25.02,0.91) v4(25.06,17.87) v4(25.12,12.96) v4(25.12,12.48) v4(25.17,14.57) v4(25.23,9.86) v4(25.15,6.49) v4(25.28,15.16) v4(25.35,12.09) v4(25.35,11.61) v4(25.31,8.62) v4(25.36,19.94) v4(25.52,18.35) v4(25.52,3.53) v4(25.57,21.53) v4(25.64,6.2) v4(25.62,5.55) v4(25.63,4.76) v4(25.57,0.53) v4(25.67,10.29) v4(25.68,9.17) v4(25.88,21.04) v4(25.88,17.8) v4(25.87,16.83) v4(25.86,2.26) v4(26.07,3.88) v4(26.2,18.87) v4(26.29,20.55) v4(26.36,15.8) v4(26.54,16.24) v4(26.5,0.99) v4(26.6,17.52) v4(26.63,16.83) v4(26.72,18.29) v4(26.72,15.39) v4(26.7,4.92) v4(26.7,3.32) v4(26.82,21.06) v4(26.89,2.26) v4(27.07,21.53) v4(27.07,20.53) v4(27.13,1.48) v4(27.07,0.53) v4(27.22,18.99) v4(27.34,4.3) v4(27.41,20.06) v4(27.48,18.21) v4(27.45,3.23) v4(27.57,2.23) v4(27.76,20.53) v4(27.75,1.03) v4(27.86,21.08) v4(27.99,18.9) v4(28.57,21.53) v4(28.59,4.63) v4(28.62,3.17) v4(28.59,2.44) v4(28.57,0.53) v4(28.71,18.99) v4(29.14,4.28) v4(29.22,19.98) v4(29.26,21.26) v4(29.68,4.62) v4(29.73,2.3) v4(29.79,19) v4(29.83,3.17) v4(30.01,19.99) v4(29.97,9.1) v4(30.07,21.53) v4(30.07,8.65) v4(30.13,4.26) v4(30.07,0.53) v4(30.54,8.07) v4(30.57,19) v4(30.59,4.62) v4(30.64,3.21) v4(30.65,2.72) v4(30.72,21.33) v4(30.73,7.51) v4(30.73,6.97) v4(30.78,8.75) v4(30.89,6.41) v4(31.02,4.26) v4(31.23,2.63) v4(31.3,8.14) v4(31.35,1.94) v4(31.36,3.19) v4(31.47,18.98) v4(31.52,6.37) v4(31.47,4.62) v4(31.57,21.53) v4(31.57,20.03) v4(31.61,8.72) v4(31.57,0.53) v4(31.68,21.04) v4(31.66,7.28) v4(31.94,20.54) v4(31.89,4.29) v4(32.04,3.19) v4(32.02,2.43) v4(32.11,8.21) v4(32.3,4.62) v4(32.25,1.47) v4(32.39,21.26) v4(32.39,20.1) v4(32.58,18.99) v4(32.59,3.21) v4(32.7,4.31) v4(32.97,20.58) v4(33.07,21.53) v4(33.07,0.53) v4(33.19,4.63) v4(33.15,2.65) v4(33.17,2) v4(33.39,3.23) v4(33.65,19.98) v4(33.56,4.31) v4(33.82,19.03) v4(34.03,21.34) v4(34,2.66) v4(34.08,3.24) v4(34.47,2.23) v4(34.57,21.53) v4(34.57,4.31) v4(34.56,2.81) v4(34.57,0.53) v4(34.67,3.25) v4(34.79,19.97) v4(34.95,19.03) v4(35.13,21.36) v4(35.87,20.01) v4(35.92,19.03) v4(36.07,21.53) v4(36.07,0.53) v4(36.8,21.25) v4(37.37,20.06) v4(37.48,21.53) v4(37.51,19.03) v4(37.45,0.51) v4(37.64,20.49) v4(38.32,20.46) v4(38.33,1.54) v4(38.37,19.03)
VBAT: length 31.8
  TOP w0.25: U1.B2 26.31,10.19 v4(26.14,10.01) 26.14,9.57 v4(26.15,9.56)
  L03_PWR-GND w0.35: v4(26.14,10.01) 26.14,9.57 v4(26.15,9.56) 26.15,4.77 27.13,3.79 34.94,3.79 35.52,3.21 35.52,3.15 ; v4(35.06,2.73) 35.1,2.73 ; 35.1,2.73 35.52,3.15 ; 35.1,2.73 v4(35.52,2.73) 35.52,3.15
  BOTTOM w0.3: J2.74 38.13,2 37.18,1.05 35.87,1.05 35.06,1.86 v4(35.06,2.73) ; v4(35.52,2.73) 35.52,2.01 36.05,1.48 37,1.48 38.02,2.5 J2.72
VDDIO: length 20.4
  TOP w0.3: 31.11,14.41 30.9,14.21 U1.M12
  TOP w0.35: 31.11,14.41 v4(36.91,14.41) 37.09,14.25 v4(37.09,14.02)
  L03_PWR-GND w0.35: v4(36.91,14.41) 37.09,14.25 v4(37.09,14.02) 37.09,5.01 v4(37.6,4.49) 38.11,4.49 v4(38.12,4.49)
  BOTTOM w0.3: 39.13,4.5 J2.64
  BOTTOM w0.35: 39.13,4.5 39.12,4.49 v4(38.12,4.49) 37.61,4.49 v4(37.6,4.49)
BT_GPIO_2: length 16.2
  L02_GND w0.127: v1(29.7,13.79) 29.45,13.79 v2(29.42,13.76)
  L03_PWR-GND w0.125: v2(29.42,13.76) 29.54,13.76 v3(29.67,13.63)
  L03_PWR-GND w0.127: v3(32.85,9.17) 32.84,9.18 32.84,9.7 32.33,10.21 32.33,13.21 32.1,13.43 32.1,13.83 32.05,13.89 32.05,13.9 v3(32.03,13.9)
  BOTTOM w0.125: 30.06,13.61 29.69,13.61 v3(29.67,13.63)
  BOTTOM w0.127: 30.06,13.61 30.53,13.61 30.78,13.86 32,13.86 32.03,13.9 v3(32.03,13.9) ; J2.48 33.52,8.5 v3(32.85,9.17)
BT_GPIO_3: length 17.9
  TOP w0.127: v1(32.08,15.78) 30.35,15.78 29.7,15.13 U1.N9
  L02_GND w0.127: v1(32.08,15.78) 32.32,15.78 v2(32.36,15.82)
  L03_PWR-GND w0.127: v2(32.36,15.82) 32.37,15.8 32.37,13.53 32.58,13.31 32.58,10.35 33.21,9.72 v3(33.21,9.4)
  BOTTOM w0.127: v3(33.21,9.4) 33.21,9.39 33.59,9 J2.46
BT_GPIO_5: length 19.6
  TOP w0.127: v1(37.72,16.37) 37.64,16.45 29.97,16.45 28.9,15.38 U1.N7
  L02_GND w0.127: v1(37.72,16.37) 37.8,16.45 v2(38.02,16.45)
  L03_PWR-GND w0.127: v2(38.02,16.45) 38.02,12.61 38.61,12.02 38.61,9.67 v3(38.64,9.64)
  BOTTOM w0.127: J2.44 38.78,9.5 v3(38.64,9.64)
BT_UART_CTS_N: length 20.2
  TOP w0.127: v4(31.17,13.01) 31.14,12.99 U1.J11 ; J2.63 39.62,4.75 39.44,4.57 v1(39.01,4.57)
  L02_GND w0.127: v2(38.9,4.84) 38.9,4.68 v1(39.01,4.57)
  L03_PWR-GND w0.127: v2(38.9,4.84) 37.93,5.82 v3(37.93,11.5)
  BOTTOM w0.127: v4(31.17,13.01) 31.23,13.08 36.17,13.08 37.75,11.5 v3(37.93,11.5) J2.36
BT_UART_RTS_N: length 11.5
  TOP w0.127: v1(31.44,13.77) 31.41,13.74 30.54,13.74 U1.L11
  L02_GND w0.127: v2(31.62,13.98) 31.62,13.95 v1(31.44,13.77)
  L03_PWR-GND w0.127: v2(31.62,13.98) 31.62,14.02 31.86,14.27 v3(31.86,14.28)
  BOTTOM w0.127: v3(31.86,14.28) 31.94,14.37 35.44,14.37 37.56,12.25 38.89,12.25 39.14,12 J2.34
BT_UART_RXD: length 11.9
  L02_GND w0.127: v2(30.38,14.18) 30.36,14.18 30.36,14.19 v1(30.1,14.19)
  L03_PWR-GND w0.127: v3(30.24,14.43) 30.24,14.41 30.38,14.28 v2(30.38,14.18)
  BOTTOM w0.127: J2.32 37.66,12.5 35.54,14.62 30.44,14.62 v3(30.24,14.43)
BT_UART_TXD: length 12.4
  L02_GND w0.127: v2(30.1,13.66) 30.1,13.66 v1(30.1,13.39)
  L03_PWR-GND w0.127: v2(30.1,13.66) 30.1,13.74 v3(29.9,13.93)
  BOTTOM w0.127: v3(29.9,13.93) 29.93,13.96 29.93,14.62 30.2,14.89 35.92,14.89 36.28,15.25 38.85,15.25 39.09,15 J2.22
CBUCK: length 5.3
  TOP w0.25: 26.27,10.99 U1.D2
  TOP w0.35: 26.27,10.99 25.48,10.99 24.27,9.78 24.27,9.23 C1.1 24.12,9.07 L1.1
CRX: length 13.5
  TOP w0.127: v4(25.39,16.61) 25.31,16.69 22.51,16.69 R7.2
  L02_GND w0.127: v1(29.3,10.19) 29.16,10.32 v2(28.9,10.32)
  L03_PWR-GND w0.127: v2(28.9,10.32) 28.7,10.53 28.22,10.53 28.07,10.68 28.07,10.81 27.84,11.04 27.56,11.04 27.25,10.73 v3(26.18,10.73)
  BOTTOM w0.127: v4(25.39,16.61) 25.4,16.6 25.4,15.99 25.72,15.66 25.72,11.19 v3(26.18,10.73)
CTX: length 11.5
  TOP w0.127: v4(25.83,16.24) 25.81,16.22 R8.2 ; U1.D6 v1(28.12,10.98)
  L02_GND w0.127: v1(28.12,10.98) 28.21,10.89 28.41,10.89 v2(28.41,10.88)
  L03_PWR-GND w0.127: v2(28.41,10.88) 28.37,10.88 27.95,11.29 27.45,11.29 27.15,10.99 26.39,10.99 v3(26.27,11.11)
  BOTTOM w0.127: v4(25.83,16.24) 25.98,16.09 25.98,11.4 v3(26.27,11.11)
DEV_WAKE: length 18.1
  TOP w0.127: U1.P8 29.3,15.26 30.23,16.19 34.43,16.19 v1(34.5,16.12)
  L02_GND w0.127: v1(34.5,16.12) v2(34.7,15.93)
  L03_PWR-GND w0.127: v3(35.19,9.89) 35.15,9.94 35.15,10.52 34.67,11 34.67,12.38 34.81,12.52 34.81,13.91 34.81,15.81 v2(34.7,15.93)
  BOTTOM w0.127: v3(35.19,9.89) 35.29,9.8 36.44,9.8 36.64,10 J2.42
EXT_LPO: length 16.8
  TOP w0.127: v4(38.58,7.99) 33.93,7.99 31.5,5.55 28.17,5.55 27.8,5.92 27.8,7.92 28.04,8.17 R1.2
  BOTTOM w0.127: v4(38.58,7.99) 38.6,8 J2.50
HOST_WAKE: length 12.2
  L02_GND w0.127: v2(29.4,14.45) 29.38,14.45 29.38,14.44 29.3,14.36 v1(29.3,14.19)
  L03_PWR-GND w0.127: v2(29.4,14.45) 29.4,14.72 v3(29.39,14.73)
  BOTTOM w0.127: J2.20 36.15,15.5 35.8,15.15 29.81,15.15 v3(29.39,14.73)
P00: length 18.7
  L02_GND w0.127: v1(28.1,11.39) 28.18,11.31 v2(28.54,11.31)
  L03_PWR-GND w0.127: v2(28.54,11.31) 28.64,11.21 v3(28.8,11.21) ; v3(34.99,11.22) 34.98,11.23 34.98,12.32 35.09,12.43 35.09,15.61 35.65,16.17 v3(35.65,17.34)
  BOTTOM w0.127: v3(28.8,11.21) 29.55,11.21 29.63,11.29 34.91,11.29 v3(34.99,11.22) ; J2.14 38.98,17 38.54,17.45 35.75,17.45 v3(35.65,17.34)
P01: length 16.1
  TOP w0.127: J2.23 39.27,14.75 38.82,15.21 34.21,15.21 v1(34.15,15.15)
  L02_GND w0.127: v1(34.15,15.15) 33.89,15.15 v2(33.87,15.13) ; v2(29.57,11.12) 29.44,10.99 v1(29.3,10.99)
  L03_PWR-GND w0.127: v2(29.57,11.12) 29.72,11.12 29.83,11.01 29.83,10.98 v3(29.83,10.98) ; v2(33.87,15.13) 33.83,15.09 v3(33.83,10.98)
  BOTTOM w0.125: v3(29.83,10.98) 29.89,11.04 29.94,11.04
  BOTTOM w0.127: 29.94,11.04 33.72,11.04 33.78,10.98 v3(33.83,10.98)
P02: length 11.5
  TOP w0.127: U1.F10 30.21,11.89 30.63,11.89 30.81,12.07 31.31,12.07 31.51,12.27 35.02,12.27 v1(35.53,11.75)
  L02_GND w0.127: v1(35.53,11.75) 35.66,11.63 v2(35.66,11.45)
  L03_PWR-GND w0.127: v3(35.66,11.17) v2(35.66,11.45)
  BOTTOM w0.127: v3(35.66,11.17) 35.83,11 J2.38
P03: length 11.9
  TOP w0.127: U1.E9 30.12,11.39 30.38,11.65 30.64,11.65 30.82,11.47 31.13,11.47 31.67,12 34.78,12 35.53,11.25 J2.37
P04: length 16
  TOP w0.127: U1.M4 27.8,14.29 27.8,14.69 27.97,14.86 27.97,16.36 29.31,17.7 39.06,17.7 39.51,17.25 J2.13
P05: length 16.9
  TOP w0.127: J2.35 39.61,11.75 39.36,11.51 36.12,11.51 35.92,11.71 35.92,11.89 v1(35.66,12.15)
  L02_GND w0.127: v1(28.5,14.19) 28.77,14.19 v2(28.78,14.19) ; v2(35.47,12.38) 35.47,12.34 v1(35.66,12.15)
  L03_PWR-GND w0.127: v3(29,14.41) 29,14.41 v2(28.78,14.19) ; v3(35.41,15.48) 35.41,15.46 35.38,15.43 35.38,12.47 v2(35.47,12.38)
  BOTTOM w0.127: v3(29,14.41) 29,14.82 29.61,15.43 35.38,15.43 35.41,15.46 v3(35.41,15.48)
P06: length 15.2
  TOP w0.127: J2.15 39.56,16.75 38.86,17.45 29.46,17.45 28.23,16.22 28.23,14.72 U1.N5
P07: length 16.8
  TOP w0.127: J2.9 40.88,18.23 28.93,18.23 v4(28.13,17.43)
  L02_GND w0.127: v1(28.1,13.79) 28.1,14.08 v2(28.1,14.08)
  L03_PWR-GND w0.127: v3(28.08,14.37) 28.1,14.35 v2(28.1,14.08)
  BOTTOM w0.127: v4(28.13,17.43) 28.08,17.38 v3(28.08,14.37)
P08: length 16.4
  TOP w0.127: J2.17 39.49,16.25 38.54,17.2 29.69,17.2 v4(28.8,16.3)
  L02_GND w0.125: 28.9,13.17 28.9,13.37 v2(28.88,13.39)
  L02_GND w0.127: 28.9,13.17 v1(28.9,12.99)
  L03_PWR-GND w0.127: v2(28.88,13.39) 28.97,13.48 28.97,13.66 v3(28.97,13.67)
  BOTTOM w0.127: v3(28.97,13.67) 28.67,13.96 28.67,15.26 28.8,15.39 v4(28.8,16.3)
P09: length 14.4
  TOP w0.127: J2.19 36.26,15.75 v1(36.16,15.85)
  L02_GND w0.127: v1(29.7,12.19) 29.97,12.19 v2(29.98,12.19) ; v1(36.16,15.85) v2(35.91,15.59)
  L03_PWR-GND w0.127: v2(35.91,15.59) 35.91,15.44 35.72,15.25 v3(35.72,12.77) ; v3(30.25,12.19) 30.22,12.19 30.22,12.19 v2(29.98,12.19)
  BOTTOM w0.127: v3(35.72,12.77) 35.44,12.48 34.86,12.48 34.62,12.24 31.86,12.24 31.73,12.11 30.32,12.11 v3(30.25,12.19)
P10: length 15.9
  TOP w0.127: J2.21 39.47,15.25 39.25,15.47 33.56,15.47 v1(33.39,15.3)
  L02_GND w0.125: v1(29.7,10.59) v2(29.98,10.59)
  L02_GND w0.127: v2(33.12,15.25) 33.17,15.3 v1(33.39,15.3)
  L03_PWR-GND w0.127: v2(29.98,10.59) 30.11,10.59 v3(30.23,10.71) ; v2(33.12,15.25) 33.14,15.23 33.14,13.41 32.87,13.14 32.87,10.73 v3(32.91,10.7)
  BOTTOM w0.127: v3(32.91,10.7) 32.89,10.71 v3(30.23,10.71)
P11: length 21.3
  L02_GND w0.125: v1(28.9,12.19) 29.11,12.19 29.16,12.24 v2(29.17,12.24)
  L03_PWR-GND w0.125: v2(29.17,12.24) 29.44,12.24 v3(29.44,12.18)
  BOTTOM w0.125: 32.66,6 32.44,5.78 28.34,5.78 27.73,6.39 27.73,9.43 27.43,9.73 27.43,11.25 28.37,12.18 v3(29.44,12.18)
  BOTTOM w0.127: 32.66,6 J2.58
P12: length 17.9
  L02_GND w0.127: v1(28.9,11.39) 29.07,11.39 29.07,11.39 29.16,11.39 29.18,11.36 v2(29.18,11.35)
  L03_PWR-GND w0.125: v2(29.18,11.35) 29.22,11.39 29.26,11.39
  L03_PWR-GND w0.127: v3(29.42,11.53) 29.28,11.39 29.26,11.39 ; v3(35.87,11.79) 36.01,11.65 36.01,9.83 36.17,9.67 36.17,5.75 v3(36.27,5.66)
  BOTTOM w0.127: J2.60 36.43,5.5 v3(36.27,5.66) ; v3(29.42,11.53) 29.44,11.55 34.31,11.55 34.55,11.79 v3(35.87,11.79)
P13: length 14.6
  L02_GND w0.127: v2(27.75,12.31) 27.75,12.54 v1(27.7,12.59)
  L03_PWR-GND w0.127: v3(28.18,11.53) 28.18,11.54 27.75,11.97 v2(27.75,12.31)
  BOTTOM w0.127: J2.40 34.39,10.5 33.93,10.04 29.48,10.04 28.18,11.34 v3(28.18,11.53)
P14: length 10.7
  TOP w0.127: U1.C11 30.62,10.47 31.31,10.47 31.57,10.21 38.24,10.21 38.7,9.75 J2.43
P15: length 12.3
  TOP w0.127: v1(32,11.68) 34.65,11.68 35.81,10.52 38.49,10.52 38.76,10.25 J2.41 ; U1.K12 31.74,13.39 32.03,13.09 v1(32.05,13.09)
  L02_GND w0.127: v1(32,11.68) 32,11.9 v2(31.94,11.96) ; v1(32.05,13.09) 32.05,12.89 v2(31.98,12.82)
  L03_PWR-GND w0.127: v2(31.94,11.96) 32.02,12.04 32.02,12.77 v2(31.98,12.82)
P16: length 22.3
  TOP w0.127: J2.67 39.01,3.75 38.9,3.87 37.33,3.87 36.93,4.26 35.15,4.26 33.87,5.55 v1(33.32,5.55)
  L02_GND w0.127: v1(33.32,5.55) 33.05,5.55 v2(33.05,5.56) ; v2(28.21,12.59) 28.21,12.59 v1(28.5,12.59)
  L03_PWR-GND w0.127: v3(32.75,5.61) 32.75,5.6 32.8,5.55 33.03,5.55 v2(33.05,5.56) ; v3(28.21,12.87) v2(28.21,12.59)
  BOTTOM w0.127: v3(28.21,12.87) 28.21,12.42 27.16,11.37 27.16,9.63 27.45,9.35 27.45,6.26 28.2,5.52 32.69,5.52 32.75,5.58 v3(32.75,5.61)
P17: length 20.6
  TOP w0.127: v1(34.74,6.14) 34.74,6.01 35.85,4.89 39.27,4.89 39.62,5.25 J2.61
  L02_GND w0.127: v1(34.74,6.14) v2(34.74,6.43) ; v1(28.5,13.39) 28.5,13.13 v2(28.55,13.08)
  L03_PWR-GND w0.125: v2(28.55,13.08) 28.65,12.98 v3(29.13,12.98)
  L03_PWR-GND w0.127: v2(34.74,6.43) 34.84,6.52 34.84,8.25 34.57,8.52 34.57,10.2 34.17,10.61 34.17,13.31 34.16,13.31 v3(34.16,13.4)
  BOTTOM w0.125: v3(29.13,12.98) 29.18,13.04
  BOTTOM w0.127: 29.18,13.04 30.68,13.04 31,13.35 31.31,13.35 31.33,13.34 34.07,13.34 34.13,13.4 v3(34.16,13.4)
P18: length 20
  TOP w0.127: v1(35.25,5.96) 36.03,5.17 39.02,5.17 39.59,5.75 J2.59
  L02_GND w0.127: v2(28.39,12.19) 28.36,12.19 28.35,12.19 v1(28.1,12.19) ; v2(35.17,6.22) 35.17,6.04 v1(35.25,5.96)
  L03_PWR-GND w0.127: v3(34.49,12.64) 34.42,12.58 34.42,10.82 34.87,10.37 34.87,8.7 35.14,8.42 35.14,6.25 v2(35.17,6.22) ; v2(28.39,12.19) 28.48,12.19 v3(28.79,12.5)
  BOTTOM w0.127: v3(34.49,12.64) 34.34,12.5 31.69,12.5 31.56,12.37 30.7,12.37 30.52,12.55 28.84,12.55 v3(28.79,12.5)
P21: length 12.7
  TOP w0.127: U1.B10 30.1,9.65 30.56,9.19 34.82,9.19 v1(35.14,8.87)
  L02_GND w0.127: v1(35.14,8.87) 35.24,8.87 v2(35.38,8.73)
  L03_PWR-GND w0.127: v3(35.48,7.44) 35.45,7.47 35.45,8.66 v2(35.38,8.73)
  BOTTOM w0.127: J2.52 35.55,7.5 v3(35.48,7.44)
P22: length 15.9
  TOP w0.127: U1.B12 31.18,10.19 31.48,9.89 35.56,9.89 35.59,9.86 v1(35.59,9.82)
  L02_GND w0.127: v1(35.59,9.82) v2(35.59,9.55)
  L03_PWR-GND w0.127: v2(35.59,9.55) 35.59,9.55 35.83,9.31 35.83,4.46 v3(35.77,4.4)
  BOTTOM w0.127: v3(35.77,4.4) 36.84,3.32 38.58,3.32 38.9,3 J2.70
P23: length 19.5
  L02_GND w0.127: v2(28.78,11.77) 28.76,11.79 v1(28.5,11.79)
  L03_PWR-GND w0.127: v3(33.58,4.93) 33.55,4.96 33.55,9.78 33.25,10.08 33.25,11.79 33.19,11.85 v3(33.19,11.87) ; v2(28.78,11.77) 29.03,11.77 v3(29.06,11.74)
  BOTTOM w0.127: v3(29.06,11.74) 29.16,11.85 33.17,11.85 v3(33.19,11.87) ; v3(33.58,4.93) 35.72,4.93 37,3.65 38.65,3.65 38.8,3.5 J2.68
P24: length 20.3
  L02_GND w0.125: v1(28.5,10.19) 28.5,10.14 28.44,10.08 v2(28.44,9.81)
  L03_PWR-GND w0.125: v3(26.86,9.03) 26.9,9.07 27.71,9.07 v2(28.44,9.81)
  BOTTOM w0.125: v3(26.86,9.03) 26.91,8.97 26.91,5.93 27.84,5 33.17,5 33.53,5.37 35.69,5.37 37.05,4 J2.66
P25: length 19.6
  L02_GND w0.125: v1(27.7,11.79) 27.43,11.79 v2(27.41,11.77)
  L03_PWR-GND w0.127: v2(27.41,11.77) 27.41,11.8 v3(27.07,12.14)
  BOTTOM w0.127: v3(27.07,12.14) 27.15,12.14 27.64,12.63 27.64,17.45 28.18,18 J2.10
P26: length 20.9
  TOP w0.127: U1.C7 v1(28.9,10.97)
  L02_GND w0.127: v1(28.9,10.97) 29.07,10.8 v2(29.07,10.72)
  L03_PWR-GND w0.127: v3(29.34,10.76) 29.09,10.76 29.07,10.74 29.07,10.73 v2(29.07,10.72) ; v3(35.26,10.87) 35.3,10.92 35.3,11.69 36.03,12.42 36.03,15.15 36.25,15.37 36.25,15.84 36.03,16.06 36.03,17.44 35.65,17.83 v3(35.65,18.66)
  BOTTOM w0.127: v3(29.34,10.76) 29.77,10.33 33.67,10.33 34.22,10.87 v3(35.26,10.87) ; J2.6 39.21,19 38.87,18.66 v3(35.65,18.66)
P27: length 18.8
  L02_GND w0.127: v2(27.02,11.38) 27.03,11.38 27.04,11.39 v1(27.3,11.39)
  L03_PWR-GND w0.127: v3(27,11.68) 27.02,11.68 v2(27.02,11.38)
  BOTTOM w0.127: J2.16 39.03,16.5 38.34,17.19 36.2,17.19 36.02,17 28.97,17 28.41,16.44 28.41,14.12 27.89,13.61 27.89,12.47 27.11,11.68 v3(27,11.68)
P28: length 15.7
  TOP w0.127: v1(33.13,6.07) 33.75,6.07 35.27,4.55 37.02,4.55 37.45,4.12 39.36,4.12 39.49,4.25 J2.65 ; v1(31.71,10.76) 31.19,10.76 31.12,10.7 30.81,10.7 30.52,10.99 U1.D10
  L02_GND w0.127: v2(31.75,10.49) 31.71,10.53 v1(31.71,10.76) ; v2(32.89,6.31) 32.89,6.31 v1(33.13,6.07)
  L03_PWR-GND w0.127: v2(31.75,10.49) 31.75,10.43 32.53,9.65 32.53,6.59 32.81,6.31 v2(32.89,6.31)
P29: length 19.1
  L02_GND w0.127: v1(27.3,12.19) 27.3,12.46 v2(27.31,12.47)
  L03_PWR-GND w0.127: v3(27.31,12.76) v2(27.31,12.47)
  BOTTOM w0.127: J2.8 39.14,18.5 38.98,18.34 28.13,18.34 27.31,17.51 v3(27.31,12.76)
P30: length 15.5
  L02_GND w0.125: v2(27.7,10.7) 27.7,10.7 v1(27.7,10.99)
  L03_PWR-GND w0.125: v3(27.75,10.43) 27.7,10.48 v2(27.7,10.7)
  BOTTOM w0.125: 31.98,9.48 28.05,9.48 27.69,9.84 27.69,10.37 v3(27.75,10.43)
  BOTTOM w0.127: 31.98,9.48 34.76,6.7 37.45,6.7 37.65,6.5 J2.56
P31: length 17
  TOP w0.125: U1.A5 27.98,9.67 v1(27.98,9.37)
  TOP w0.127: J2.33 39.47,12.25 39.04,11.82 36.26,11.82 v1(36.25,11.84)
  L02_GND w0.125: v2(27.81,9.79) 27.99,9.62 27.99,9.37 v1(27.98,9.37)
  L02_GND w0.127: v2(36.25,12.12) v1(36.25,11.84)
  L03_PWR-GND w0.125: v2(27.81,9.79) 27.97,9.95 v3(28.04,9.95)
  L03_PWR-GND w0.127: v3(36.34,10.18) 36.28,10.24 36.28,12.09 v2(36.25,12.12)
  BOTTOM w0.125: v3(28.04,9.95) 28.24,9.75 29.07,9.75
  BOTTOM w0.127: 29.07,9.75 34.06,9.75 34.53,10.22 36.3,10.22 v3(36.34,10.18)
P32: length 20.5
  TOP w0.127: J2.73 39.5,2.25 38.41,3.34 37.11,3.34 36.81,3.63 28.5,3.63 26.95,5.18 26.95,8.75 27.7,9.5 U1.B4
P33: length 23.8
  TOP w0.125: 38.65,3.59 37.24,3.59 36.94,3.89 28.79,3.89 v4(28.03,4.65)
  TOP w0.127: J2.71 39.49,2.75 38.65,3.59
  L02_GND w0.127: v1(27.3,12.99) 27.03,12.99 v2(27,13.02)
  L03_PWR-GND w0.127: v3(26.71,12.99) 26.73,13 27,13 v2(27,13.02)
  BOTTOM w0.127: v3(26.71,12.99) 26.23,12.5 26.23,11.61 26.63,11.21 26.63,9.32 26.53,9.22 26.53,8.84 26.62,8.76 26.62,5.78 27.75,4.64 28.02,4.64 v4(28.03,4.65)
P34: length 17.7
  L02_GND w0.127: v1(28.1,12.99) 27.95,13.13 27.84,13.13 27.84,13.14 v2(27.84,13.14)
  L03_PWR-GND w0.127: v2(27.84,13.14) 27.84,13.13 28.17,13.46 28.23,13.46 v3(28.27,13.49) ; v3(32.77,17.65) 32.75,17.63 32.75,13.73 v3(32.8,13.68)
  BOTTOM w0.127: J2.12 39.07,17.5 38.87,17.7 32.82,17.7 v3(32.77,17.65) ; v3(32.8,13.68) 32.72,13.59 31.43,13.59 31.41,13.61 30.89,13.61 30.59,13.31 28.88,13.31 28.7,13.49 v3(28.27,13.49)
P37: length 21.3
  L02_GND w0.127: v2(26.62,12.55) 26.66,12.59 v1(26.9,12.59)
  L03_PWR-GND w0.127: v3(26.59,12.27) 26.62,12.3 v2(26.62,12.55)
  BOTTOM w0.127: v3(26.59,12.27) 26.59,11.61 26.91,11.3 26.91,9.52 27.2,9.23 27.2,6.05 27.99,5.26 33.02,5.26 33.42,5.67 35.81,5.67 36.47,5 J2.62
P38: length 17.4
  TOP w0.127: J2.11 39.54,17.75 39.32,17.97 29.18,17.97 27.41,16.2 27.41,14.88 27.57,14.72 27.57,14.45 27.41,14.28 27.41,14.09 27.7,13.79 U1.K4
RF: length 1.4
  TOP w0.3: U1.L1 26.5,13.78 LC8.2 25.06,13.78 LC7.1
RST_N: length 18.6
  TOP w0.127: v1(32.92,15.81) 32.61,15.81 32.26,15.46 30.58,15.46 U1.P10
  L02_GND w0.127: v1(32.92,15.81) 33.13,15.81 v2(33.21,15.74)
  L03_PWR-GND w0.127: v3(34.51,7.51) 34.51,8.16 34.23,8.44 34.23,10.09 33.51,10.81 33.51,15.47 33.22,15.75 v2(33.21,15.74)
  BOTTOM w0.127: v3(34.51,7.51) 35.02,7 J2.54
VPA_BT: length 30.2
  TOP w0.25: 22.83,12.62 22.82,12.63 U3.16
  TOP w0.3: C19.1 22.83,11.6 C18.2 ; C18.2 22.82,12.26 C20.1 ; C18.2 22.83,12.62
  TOP w0.35: C19.1 23.56,11.47 v4(23.58,11.49) 24.07,11.49 v4(24.08,11.5)
  BOTTOM w0.3: J2.4 38.35,19.5 38.35,19.87 38.49,20 J2.2
  BOTTOM w0.35: 38.35,19.5 25.84,19.5 24.08,17.73 v4(24.08,11.5) 23.65,11.5 23.6,11.48 v4(23.58,11.49)
N16860919: length 2.9
  TOP w0.25: 26.61,9.35 27.05,9.79 U1.A3
  TOP w0.35: 26.61,9.35 25.92,8.65 L1.2
N16861443: length 3.3
  TOP w0.127: Y1.2 30.01,7.03 29.54,7.5 C3.1 29.55,7.84 R6.2 29.55,9.63 U1.A9
N16861445: length 3.8
  TOP w0.127: R6.1 29.07,9.62 U1.A7 ; R6.1 29.07,7.86 C2.1 29.04,7.46 28.61,7.04 Y1.1 ; R6.1 29.06,8.62 R1.1
N18809916: length 1.3
  TOP w0.2: 23.66,13.78 23.25,13.78 U3.2
  TOP w0.3: LC7.2 LC9.2 23.66,13.78
N18809920: length 1.3
  TOP w0.3: LC4.1 19.36,14.89 LC6.2 FL1.1
